# EAGLE board TSC_Board (EAGLE 9.7.0)
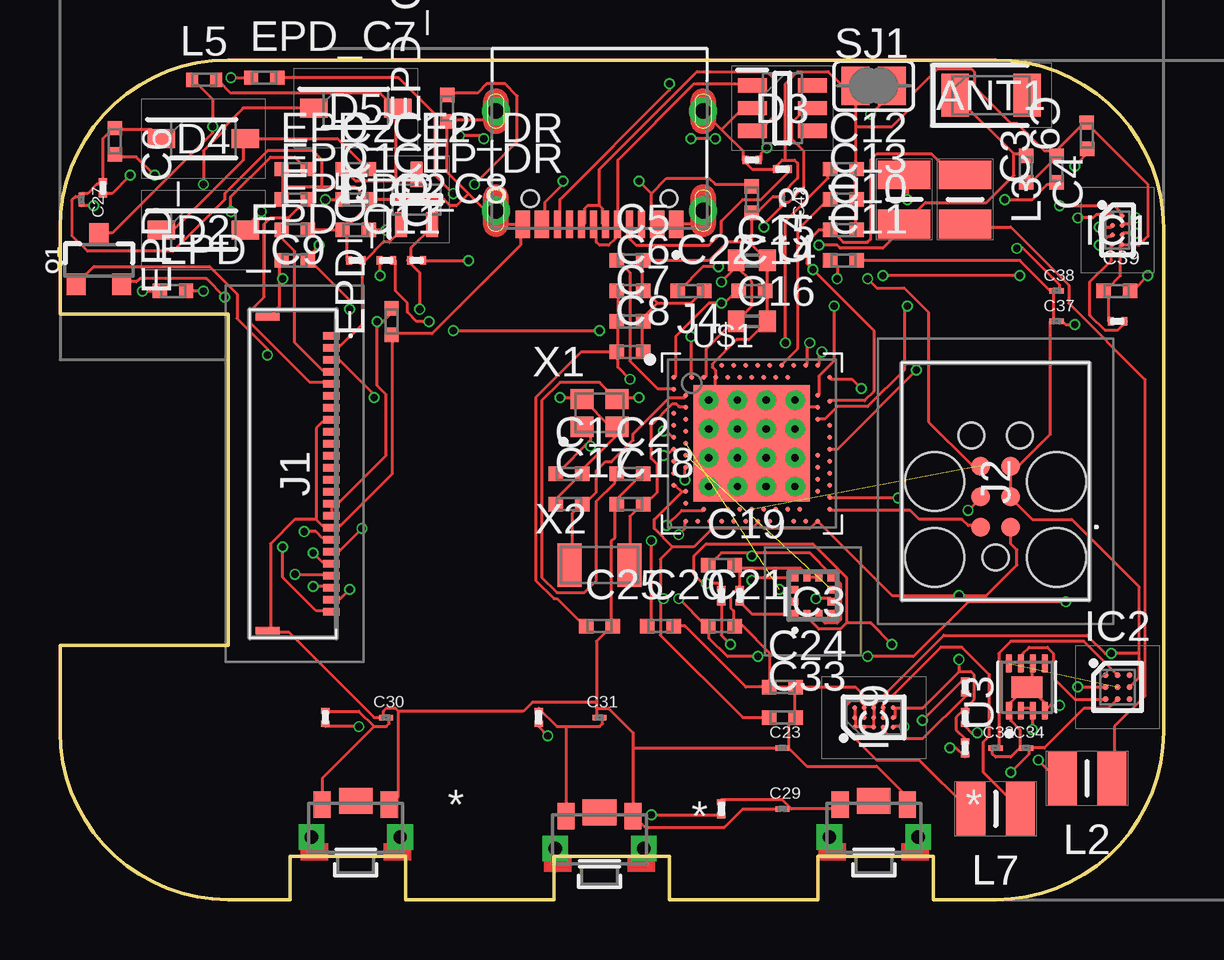
[diagram p0: board, top side]
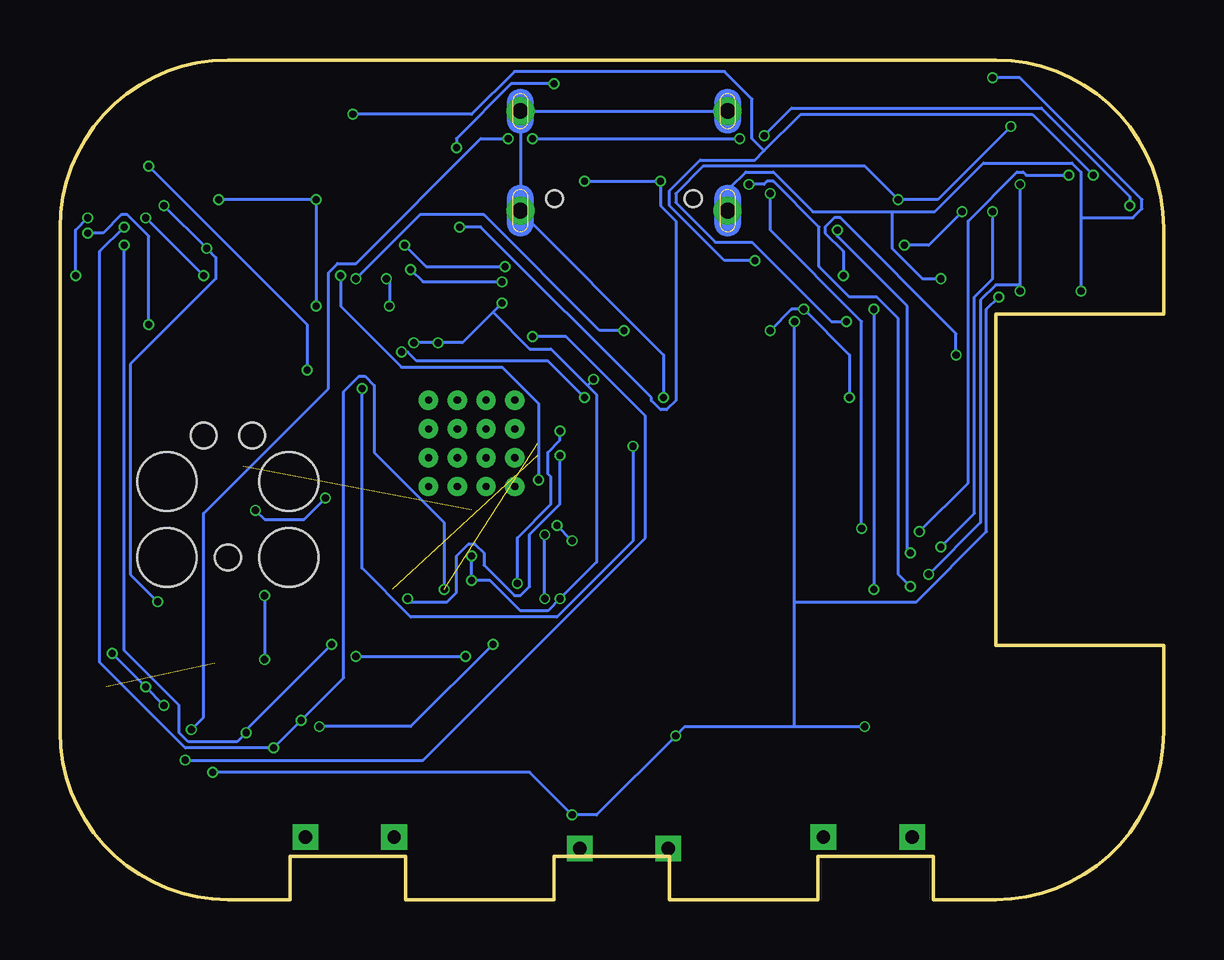
[diagram p1: board, bottom side, seen from below]

Size 46 x 35 mm. Coordinates in mm from the lower left corner, seen from the top.
Outline: 39,0 36.4,0 36.4,1.8 31.6,1.8 31.6,0 25.4,0 25.4,1.8 20.6,1.8 20.6,0 14.4,0 14.4,1.8 9.6,1.8 9.6,0 7,0 arc-90 0,7 0,10.6 7,10.6 7,24.4 0,24.4 0,28 arc-90 7,35 39,35 arc-90 46,28 46,7 arc-90 39,0
Copper layers (1*2+15*16): Top 0.035mm / dielectric 0.1mm / Route2 0.035mm / dielectric 0.7mm / Route15 0.035mm / dielectric 0.2mm / Bottom 0.035mm
Design rules "jlcpcb-2layers": minimum track width 5mil, minimum drill 0.3mm, track to track 5mil, track to pad 5mil, pad to pad 5mil, via to via 5mil, smd to smd 5mil, copper to edge 0.2mm, drill to drill 6mil, minimum pad ring 10mil, minimum via ring 3mil, stop-mask expansion 4mil, vias tented up to drill 0mil, thermal gap 10mil

## Footprints (pad centres in the part's own frame; a part is rotated, then mirrored left to right if it is on the bottom)
2450AT18B100E_ANTC3216X140N = smd 1.15 x 1.8: 1 -1.5,0; 2 1.5,0
NORDIC_NRF_3_RESC0402_N = smd 0.6 x 0.6: 1 -0.55,0; 2 0.55,0
ESP32_C6_LIBRARY_1_ESP32_WROVER_EAGLE-LTSPICE_C0402 = smd 0.7 x 0.9: 1 -0.65,0; 2 0.65,0
GRM011R60J152KE01L_2_CAPC0201X13N = smd 0.22 x 0.23: 1 -0.185,0; 2 0.185,0
ESP32_C6_LIBRARY_5_SOD3716X135N = smd 1.15 x 0.8: 1 -1.75,0; 2 1.75,0
ESP32_C6_LIBRARY_3_SOT95P280X145-6N = smd 1.2 x 0.6: 1 -1.25,0.95; 2 -1.25,0; 3 -1.25,-0.95; 4 1.25,-0.95; 5 1.25,0; 6 1.25,0.95
BQ25180YBGR_BGA8C40P2X4_100X155X50 = smd 0.2 x 0.2: A1 -0.2,0.6; A2 0.2,0.6; B1 -0.2,0.2; B2 0.2,0.2; C1 -0.2,-0.2; C2 0.2,-0.2; D1 -0.2,-0.6; D2 0.2,-0.6
DRV2605YZFR_BGA9C50P3X3_144X144X62 = smd 0.25 x 0.25: A1 -0.5,0.5; A2 0,0.5; A3 0.5,0.5; B1 -0.5,0; B2 0,0; B3 0.5,0; C1 -0.5,-0.5; C2 0,-0.5; C3 0.5,-0.5
BMA423_BMA423 = smd 0.3 x 0.35: 1 -0.75,-0.775; 2 -0.25,-0.775; 3 0.25,-0.775; 4 0.75,-0.775; 7 0.75,0.775; 8 0.25,0.775; 9 -0.25,0.775; 10 -0.75,0.775 | smd 0.35 x 0.3: 5 0.775,-0.25; 6 0.775,0.25; 11 -0.775,0.25; 12 -0.775,-0.25
RT6160AWSC_BGA15C40P3X5_140X230X60 = smd 0.216 x 0.216: A1 -0.4,0.8; A2 0,0.8; A3 0.4,0.8; B1 -0.4,0.4; B2 0,0.4; B3 0.4,0.4; C1 -0.4,0; C2 0,0; C3 0.4,0; D1 -0.4,-0.4; D2 0,-0.4; D3 0.4,-0.4; E1 -0.4,-0.8; E2 0,-0.8; E3 0.4,-0.8
503480-2400_5034802400 = smd 0.3 x 0.7: 1 -5.75,1.525; 2 -5.25,1.525; 3 -4.75,1.525; 4 -4.25,1.525; 5 -3.75,1.525; 6 -3.25,1.525; 7 -2.75,1.525; 8 -2.25,1.525; 9 -1.75,1.525; 10 -1.25,1.525; 11 -0.75,1.525; 12 -0.25,1.525; 13 0.25,1.525; 14 0.75,1.525; 15 1.25,1.525; 16 1.75,1.525; 17 2.25,1.525; 18 2.75,1.525; 19 3.25,1.525; 20 3.75,1.525; 21 4.25,1.525; 22 4.75,1.525; 23 5.25,1.525; 24 5.75,1.525 | smd 0.3 x 1: MP1 -6.54,-1.125; MP2 6.54,-1.125
TC2030-IDC_TC2030IDC = smd 0.783 x 0.783: 1 -0.953,-0.635; 2 -0.953,0.635; 3 0.317,-0.635; 4 0.317,0.635; 5 1.588,-0.635; 6 1.588,0.635 | hole 2.451: -2.223,-2.54; -2.223,2.54; 0.952,-2.54; 0.952,2.54 | hole 1.067: -2.223,0; 2.857,-1.016; 2.857,1.016
KH-TYPE-C-16P_KINGHELM_KH-TYPE-C-16P = smd 0.6 x 1.15: A1_B12 -3.2,4.725; A4_B9 -2.4,4.725; A9_B4 2.4,4.725; A12_B1 3.2,4.725 | smd 0.3 x 1.15: A5 -1.25,4.725; A6 -0.25,4.725; A7 0.25,4.725; A8 1.25,4.725; B5 1.75,4.725; B6 0.75,4.725; B7 -0.75,4.725; B8 -1.75,4.725 | drill 0.65 pad 1.05: SH1 -4.32,0; SH2 4.32,0; SH3 -4.32,4.15; SH4 4.32,4.15 | hole 0.7: -2.89,3.65; 2.89,3.65
MLP2016SR47MT0S1_INDC2016X100N = smd 1.2 x 2.2: 1 -1.028,0; 2 1.028,0
NORDIC_NRF_2_RESC0402_L = smd 0.5 x 0.6: 1 -0.5,0; 2 0.5,0
ESP32_C6_LIBRARY_4_ESP32_C6_LIBRARY_4_ESP32_C6_LIBRARY_4_ESP32_C6_LIBRARY_4_ESP32_WROVER_SPARKFUN-DISCRETESEMI_SOT23-3 = smd 0.8 x 0.9: 1 -0.95,-1; 2 0.95,-1; 3 0,1.1
ESP32_C6_LIBRARY_6_SOT65P210X110-3N = smd 1.05 x 0.5: 1 -1.05,0.65; 2 -1.05,-0.65; 3 1.05,0
CPF0201D7K68C1_0201 = smd 0.35 x 0.25: 1 0,0.275; 2 0,-0.275
ESP32_C6_LIBRARY_7_JUMPER_SJ = smd 1.168 x 1.6: 1 -0.762,0; 2 0.762,0
2025-10-22_07-23-44_LIBRARY_SW_EVP-AKE31A_PAN = smd 0.711 x 1.092: 1 -1.4,-0.972; 2 1.4,-0.972 | drill 0.559 pad 0.914 square: 3 -1.848,0.381; 4 1.848,0.381 | smd 1.397 x 1.092: 5 0,-1.124
ESP32_C6_LIBRARY_SON50P200X200X80-9N = smd 0.76 x 0.27: 1 -0.985,0.75; 2 -0.985,0.25; 3 -0.985,-0.25; 4 -0.985,-0.75; 5 0.985,-0.75; 6 0.985,-0.25; 7 0.985,0.25; 8 0.985,0.75 | smd 0.9 x 1.3: 9 0,0
NORDIC_NRF_4_AQFN50P700X700X85_HS-74N = smd 4.85 x 4.85: P$74 0,0 | drill 0.3 pad 0.6: P$75 -1.8,1.8; P$76 -0.6,1.8; P$77 0.6,1.8; P$78 1.8,1.8; P$79 -1.8,0.6; P$80 -0.6,0.6; P$81 0.6,0.6; P$82 1.8,0.6; P$83 -1.8,-0.6; P$84 -0.6,-0.6; P$85 0.6,-0.6; P$86 1.8,-0.6; P$87 -1.8,-1.8; P$88 -0.6,-1.8; P$89 0.6,-1.8; P$90 1.8,-1.8 | smd 0.2 x 0.2: P$A8 -1.25,3.25; P$A10 -0.75,3.25; P$A12 -0.25,3.25; P$A14 0.25,3.25; P$A16 0.75,3.25; P$A18 1.25,3.25; P$A20 1.75,3.25; P$A22 2.25,3.25; P$A23 2.75,3.25; P$AA24 3.25,-2.25; P$AB2 -2.75,-2.5; P$AC5 -2,-2.75; P$AC9 -1,-2.75; P$AC11 -0.5,-2.75; P$AC13 0,-2.75; P$AC15 0.5,-2.75; P$AC17 1,-2.75; P$AC19 1.5,-2.75; P$AC21 2,-2.75; P$AC24 3.25,-2.75; P$AD2 -2.75,-3.25; P$AD4 -2.25,-3.25; P$AD6 -1.75,-3.25; P$AD8 -1.25,-3.25; P$AD10 -0.75,-3.25; P$AD12 -0.25,-3.25; P$AD14 0.25,-3.25; P$AD16 0.75,-3.25; P$AD18 1.25,-3.25; P$AD20 1.75,-3.25; P$AD22 2.25,-3.25; P$AD23 2.75,-3.25; P$B1 -3.25,2.75; P$B3 -2.5,2.75; P$B5 -2,2.75; P$B7 -1.5,2.75; P$B9 -1,2.75; P$B11 -0.5,2.75; P$B13 0,2.75; P$B15 0.5,2.75; P$B17 1,2.75; P$B19 1.5,2.75; P$B24 3.25,2.75; P$C1 -3.25,2.25; P$D2 -2.75,2; P$D23 2.75,2; P$E24 3.25,1.75; P$F2 -2.75,1.5; P$F23 2.75,1.5; P$G1 -3.25,1.25; P$H2 -2.75,1; P$H23 2.75,1; P$J1 -3.25,0.75; P$J24 3.25,0.75; P$K2 -2.75,0.5; P$L1 -3.25,0.25; P$L24 3.25,0.25; P$M2 -2.75,0; P$N1 -3.25,-0.25; P$N24 3.25,-0.25; P$P2 -2.75,-0.5; P$P23 2.75,-0.5; P$R1 -3.25,-0.75; P$R24 3.25,-0.75; P$T2 -2.75,-1; P$T23 2.75,-1; P$U1 -3.25,-1.25; P$U24 3.25,-1.25; P$V23 2.75,-1.5; P$W1 -3.25,-1.75; P$W24 3.25,-1.75; P$Y2 -2.75,-2; P$Y23 2.75,-2
NORDIC_NRF_BT-XTAL_2016_N = smd 0.95 x 0.85: 1 -0.725,-0.575; 2 0.725,-0.575; 3 0.725,0.575; 4 -0.725,0.575
NORDIC_NRF_1_XTAL_3215_N = smd 1 x 1.8: 1 -1.25,0; 2 1.25,0

## Placement (x,y rotation side)
ANT1  2450AT18B100E  [2450AT18B100E_ANTC3216X140N]  38.8,33.53 0 top
C1  12pF  [NORDIC_NRF_3_RESC0402_N]  21.22,17.75 0 top
C1_EP_DR  10uF  [NORDIC_NRF_3_RESC0402_N]  12.33,29.18 0 top
C2  12pF  [NORDIC_NRF_3_RESC0402_N]  23.76,17.75 0 top
C2_EP_DR  4.7uF/25V  [NORDIC_NRF_3_RESC0402_N]  12.33,30.45 0 top
C3  1pF  [NORDIC_NRF_3_RESC0402_N]  41.54,30.45 90 top
C4  1pF  [NORDIC_NRF_3_RESC0402_N]  40.27,30.45 270 top
C5  100nF  [NORDIC_NRF_3_RESC0402_N]  23.76,26.64 0 top
C6  4.7uF  [NORDIC_NRF_3_RESC0402_N]  23.76,25.37 0 top
C7  100nF  [NORDIC_NRF_3_RESC0402_N]  23.76,24.1 0 top
C8  100nF  [NORDIC_NRF_3_RESC0402_N]  23.76,22.83 0 top
C9  820pF  [NORDIC_NRF_3_RESC0402_N]  42.8,31.84 90.8 top
C10  N.C.  [NORDIC_NRF_3_RESC0402_N]  32.65,27.91 0 top
C11  100pF  [NORDIC_NRF_3_RESC0402_N]  32.65,26.64 0 top
C12  100nF  [NORDIC_NRF_3_RESC0402_N]  32.65,30.45 0 top
C13  N.C.  [NORDIC_NRF_3_RESC0402_N]  32.65,29.18 0 top
C14  4.7uF  [NORDIC_NRF_3_RESC0402_N]  28.84,25.37 0 top
C15  1.0uF  [ESP32_C6_LIBRARY_1_ESP32_WROVER_EAGLE-LTSPICE_C0402]  28.84,26.64 0 top
C16  47nF  [ESP32_C6_LIBRARY_1_ESP32_WROVER_EAGLE-LTSPICE_C0402]  28.84,24.1 0 top
C17  12pF  [NORDIC_NRF_3_RESC0402_N]  21.22,16.48 0 top
C18  12pF  [NORDIC_NRF_3_RESC0402_N]  23.76,16.48 0 top
C19  100nF  [NORDIC_NRF_3_RESC0402_N]  27.57,13.94 0 top
C20  4.7uF  [NORDIC_NRF_3_RESC0402_N]  25.03,11.4 0 top
C21  4.7uF  [NORDIC_NRF_3_RESC0402_N]  27.57,11.4 0 top
C22  N.C.  [NORDIC_NRF_3_RESC0402_N]  26.3,25.37 0 top
C23  0.1uF  [GRM011R60J152KE01L_2_CAPC0201X13N]  30.11,6.32 0 top
C24  10uF  [NORDIC_NRF_3_RESC0402_N]  30.11,8.86 0 top
C25  22uF  [NORDIC_NRF_3_RESC0402_N]  22.49,11.4 0 top
C27  0.1uF  [GRM011R60J152KE01L_2_CAPC0201X13N]  0.9,29.18 270 top
C29  1uF  [GRM011R60J152KE01L_2_CAPC0201X13N]  30.11,3.78 0 top
C30  1uF  [GRM011R60J152KE01L_2_CAPC0201X13N]  13.6,7.59 0 top
C31  1uF  [GRM011R60J152KE01L_2_CAPC0201X13N]  22.49,7.59 0 top
C32  1uF  [GRM011R60J152KE01L_2_CAPC0201X13N]  39,6.32 0 top
C33  22uF  [NORDIC_NRF_3_RESC0402_N]  30.11,7.59 0 top
C34  0.1uF  [GRM011R60J152KE01L_2_CAPC0201X13N]  40.27,6.32 0 top
C37  1uF  [GRM011R60J152KE01L_2_CAPC0201X13N]  41.54,24.1 0 top
C38  1uF  [GRM011R60J152KE01L_2_CAPC0201X13N]  41.54,25.37 0 top
C39  10uF  [NORDIC_NRF_3_RESC0402_N]  44.05,25.37 0 top
C42  0.1uF  [GRM011R60J152KE01L_2_CAPC0201X13N]  30.11,29.18 270 top
C43  4.7uF  [NORDIC_NRF_3_RESC0402_N]  28.84,29.18 270 top
D2  MBR0530  [ESP32_C6_LIBRARY_5_SOD3716X135N]  5.98,27.91 0 top
D3  USBLC6-2SC6Y  [ESP32_C6_LIBRARY_3_SOT95P280X145-6N]  30.11,32.99 0 top
D4  MBR0530  [ESP32_C6_LIBRARY_5_SOD3716X135N]  5.98,31.72 0 top
D5  MBR0530  [ESP32_C6_LIBRARY_5_SOD3716X135N]  12.33,32.99 0 top
EPD_C1  1uF/50V  [NORDIC_NRF_3_RESC0402_N]  9.79,29.18 0 top
EPD_C2  1uF/50V  [NORDIC_NRF_3_RESC0402_N]  9.79,27.91 0 top
EPD_C5  0.1uF/50V  [NORDIC_NRF_3_RESC0402_N]  13.82,24.1 90 top
EPD_C6  1uF/50V  [NORDIC_NRF_3_RESC0402_N]  2.28,31.61 270 top
EPD_C7  1uF/50V  [NORDIC_NRF_3_RESC0402_N]  8.52,34.26 0 top
EPD_C8  1uF/50V  [NORDIC_NRF_3_RESC0402_N]  12.33,27.91 0 top
EPD_C9  1uF/50V  [NORDIC_NRF_3_RESC0402_N]  4.71,25.37 0 top
EPD_C10  1uF/50V  [NORDIC_NRF_3_RESC0402_N]  16.14,32.99 90 top
EPD_C11  1uF/50V  [NORDIC_NRF_3_RESC0402_N]  9.79,26.64 0 top
EPD_C12  1uF/50V  [NORDIC_NRF_3_RESC0402_N]  9.79,30.45 0 top
IC1  BQ25180YBGR  [BQ25180YBGR_BGA8C40P2X4_100X155X50]  44.08,27.91 0 top
IC2  DRV2605YZFR  [DRV2605YZFR_BGA9C50P3X3_144X144X62]  44.08,8.86 0 top
IC3  BMA423  [BMA423_BMA423]  31.38,12.67 0 top
IC9  RT6160AWSC  [RT6160AWSC_BGA15C40P3X5_140X230X60]  33.92,7.59 90 top
J1  503480-2400  [503480-2400_5034802400]  9.79,17.75 270 top
J2  TC2030-IDC  [TC2030-IDC_TC2030IDC]  39,16.48 90 top
J4  KH-TYPE-C-16P  [KH-TYPE-C-16P_KINGHELM_KH-TYPE-C-16P]  22.49,32.87 180 top
L1  3.9nH  [MLP2016SR47MT0S1_INDC2016X100N]  35.19,29.18 270 top
L2  10uH  [MLP2016SR47MT0S1_INDC2016X100N]  42.81,5.05 0 top
L3  15nH  [MLP2016SR47MT0S1_INDC2016X100N]  37.73,29.18 90 top
L5  68uH  [NORDIC_NRF_2_RESC0402_L]  6,34.17 0 top
L7  FTC252012SR47MBCA  [MLP2016SR47MT0S1_INDC2016X100N]  39,3.78 0 top
Q1  20V/4.2A/52mΩ/1.4W  [ESP32_C6_LIBRARY_4_ESP32_C6_LIBRARY_4_ESP32_C6_LIBRARY_4_ESP32_C6_LIBRARY_4_ESP32_WROVER_SPARKFUN-DISCRETESEMI_SOT23-3]  1.63,26.64 0 top
Q3  SI1308EDL-T1-GE3  [ESP32_C6_LIBRARY_6_SOT65P210X110-3N]  14.87,29.18 90 top
R1_EP_DR  0.47  [CPF0201D7K68C1_0201]  14.87,26.64 270 top
R1_USB  5K1  [CPF0201D7K68C1_0201]  30.11,30.45 90 top
R1_USB1  5K1  [CPF0201D7K68C1_0201]  28.84,30.83 270 top
R2  0  [CPF0201D7K68C1_0201]  27.57,12.67 0 top
R2_EP_DR  10K  [CPF0201D7K68C1_0201]  12.33,26.64 90 top
R3  0  [CPF0201D7K68C1_0201]  28.34,12.67 0 top
R4  0  [CPF0201D7K68C1_0201]  37.73,8.86 0 top
R5  10K  [CPF0201D7K68C1_0201]  11.06,7.59 0 top
R7  10K  [CPF0201D7K68C1_0201]  27.57,3.78 0 top
R8  10K  [CPF0201D7K68C1_0201]  19.95,7.59 0 top
R9  10K  [CPF0201D7K68C1_0201]  44.08,24.1 90 top
R17  3K3  [CPF0201D7K68C1_0201]  37.73,6.32 0 top
R18  3K3  [CPF0201D7K68C1_0201]  37.73,7.59 0 top
R_PWR_EPD  10K  [CPF0201D7K68C1_0201]  13.6,26.64 90 top
R_TYPE_SEL  2.2  [CPF0201D7K68C1_0201]  1.79,29.66 0 top
SJ1  [ESP32_C6_LIBRARY_7_JUMPER_SJ]  33.92,33.92 0 top
SW_DN  2025-10-22_07-23-44_LIBRARY_EVP-AKE31ASW_EVP-AKE31A_PAN  [2025-10-22_07-23-44_LIBRARY_SW_EVP-AKE31A_PAN]  33.92,2.99 180 top
SW_ENT  2025-10-22_07-23-44_LIBRARY_EVP-AKE31ASW_EVP-AKE31A_PAN  [2025-10-22_07-23-44_LIBRARY_SW_EVP-AKE31A_PAN]  22.49,2.51 180 top
SW_UP  2025-10-22_07-23-44_LIBRARY_EVP-AKE31ASW_EVP-AKE31A_PAN  [2025-10-22_07-23-44_LIBRARY_SW_EVP-AKE31A_PAN]  12.33,2.99 180 top
U3  MAX17048G+T10  [ESP32_C6_LIBRARY_SON50P200X200X80-9N]  40.31,8.86 90 top
U$1  NRF52840_QF  [NORDIC_NRF_4_AQFN50P700X700X85_HS-74N]  28.84,19.02 0 top
X1  32MHz  [NORDIC_NRF_BT-XTAL_2016_N]  22.49,20.29 0 top
X2  32.768kHz  [NORDIC_NRF_1_XTAL_3215_N]  22.49,13.94 0 top

## Library data of the parts
ANT1 = InkTime_v5; ARROW_PART_NUMBER: 2450AT18B100E; ARROW_PRICE-STOCK: https://www.arrow.com/en/products/2450at18b100e/johanson-dielectrics?utm_currency=USD&region=nac; DESCRIPTION: Antennas 2.45GHz ANTENNA; HEIGHT: 1.4mm; MANUFACTURER_NAME: JOHANSON TECHNOLOGY; MANUFACTURER_PART_NUMBER: 2450AT18B100E; MOUSER_PART_NUMBER: 609-2450AT18B100E; MOUSER_PRICE-STOCK: https://www.mouser.co.uk/ProductDetail/Johanson-Technology/2450AT18B100E?qs=yCnrNFeXz%252Bh5MFsFIXGZGA%3D%3D
C1 C1_EP_DR C2 C2_EP_DR C3-C14 C17-C22 C24 C25 C33 C39 C43 EPD_C1 EPD_C2 EPD_C5-EPD_C12 L5 R1_EP_DR R1_USB R1_USB1 R2 R2_EP_DR R3-R5 R7-R9 R17 R18 R_PWR_EPD R_TYPE_SEL SJ1 U$1 X1 X2 = InkTime_v5
C15 C16 = InkTime_v5; SPICEMODEL: NONE; SPICEPREFIX: C
C23 C27 C29-C32 C34 C37 C38 C42 = InkTime_v5; AVAILABILITY: In Stock; CHECK_PRICES: https://www.snapeda.com/parts/GRM011R60J152KE01L/Murata/view-part/?ref=eda; DESCRIPTION: SMD Capacitor X5R(EIA) with Capacitance: 1500pF Tol. 10%. Rated Voltage: 6.3Vdc; MF: Murata; MP: GRM011R60J152KE01L; PACKAGE: 0201 Murata; PRICE: None; SNAPEDA_LINK: https://www.snapeda.com/parts/GRM011R60J152KE01L/Murata/view-part/?ref=snap
D2 D4 D5 = InkTime_v5; AVAILABILITY: In Stock; CHECK_PRICES: https://www.snapeda.com/parts/MBR0530/Onsemi/view-part/?ref=eda; DESCRIPTION: Diode Schottky 30 V 500mA Surface Mount SOD-123; MF: ON Semiconductor; MP: MBR0530; PACKAGE: SOD-123-2 ON Semiconductor; PRICE: None; PURCHASE-URL: https://www.snapeda.com/api/url_track_click_mouser/?unipart_id=179458&manufacturer=ON Semiconductor&part_name=MBR0530&search_term=None; SNAPEDA_LINK: https://www.snapeda.com/parts/MBR0530/Onsemi/view-part/?ref=snap
D3 = InkTime_v5; AVAILABILITY: In Stock; CHECK_PRICES: https://www.snapeda.com/parts/USBLC6-2SC6Y/STMicroelectronics/view-part/?ref=eda; DESCRIPTION: 17V Clamp 5A (8/20µs) Ipp Tvs Diode Surface Mount SOT-23-6; MF: STMicroelectronics; MP: USBLC6-2SC6Y; PACKAGE: SOT-23-6 STMicroelectronics; PRICE: None; SNAPEDA_LINK: https://www.snapeda.com/parts/USBLC6-2SC6Y/STMicroelectronics/view-part/?ref=snap
IC1 = InkTime_v5; ARROW_PART_NUMBER: BQ25180YBGR; ARROW_PRICE-STOCK: https://www.arrow.com/en/products/bq25180ybgr/texas-instruments?utm_currency=USD&region=nac; DESCRIPTION: Charger IC Lithium Ion/Polymer, Lithium Iron Phosphate 8-DSBGA (1.6x1.1); HEIGHT: 0.5mm; MANUFACTURER_NAME: Texas Instruments; MANUFACTURER_PART_NUMBER: BQ25180YBGR; MOUSER_PART_NUMBER: 595-BQ25180YBGR; MOUSER_PRICE-STOCK: https://www.mouser.co.uk/ProductDetail/Texas-Instruments/BQ25180YBGR?qs=doiCPypUmgEWjAK%252BJAX6Tw%3D%3D
IC2 = InkTime_v5; ARROW_PART_NUMBER: DRV2605YZFR; ARROW_PRICE-STOCK: https://www.arrow.com/en/products/drv2605yzfr/texas-instruments?region=nac; DESCRIPTION: Haptic Driver for ERM/LRA with Built-In Library and Smart Loop Architecture; HEIGHT: 0.625mm; MANUFACTURER_NAME: Texas Instruments; MANUFACTURER_PART_NUMBER: DRV2605YZFR
IC3 = InkTime_v5; ARROW_PART_NUMBER: BMA423; ARROW_PRICE-STOCK: https://www.arrow.com/en/products/bma423/bosch; DESCRIPTION: Accelerometers Triaxial low-g 12bit Acceleration Sensor; HEIGHT: 1mm; MANUFACTURER_NAME: BOSCH; MANUFACTURER_PART_NUMBER: BMA423; MOUSER_PART_NUMBER: 262-BMA423; MOUSER_PRICE-STOCK: https://www.mouser.co.uk/ProductDetail/Bosch-Sensortec/BMA423?qs=HXFqYaX1Q2xC%252BSgeGoX3mg%3D%3D
IC9 = InkTime_v5; DESCRIPTION: Buck-Boost Regulator Positive Output Step-Up/Step-Down I2C DC-DC Controller IC 15-WL-CSP (BSC) (1.4x2.3); HEIGHT: 0.6mm; MANUFACTURER_NAME: RICHTEK; MANUFACTURER_PART_NUMBER: RT6160AWSC; MOUSER_PART_NUMBER: 835-RT6160AWSC; MOUSER_PRICE-STOCK: https://www.mouser.co.uk/ProductDetail/Richtek/RT6160AWSC?qs=amGC7iS6iy%2FLd9PSoixZXQ%3D%3D
J1 = InkTime_v5; DESCRIPTION: FFC & FPC Connectors 0.5mm FPC RA SMT Dual Contact 24Ckt; HEIGHT: 1.87mm; MANUFACTURER_NAME: Molex; MANUFACTURER_PART_NUMBER: 503480-2400; MOUSER_PART_NUMBER: 538-503480-2400; MOUSER_PRICE-STOCK: https://www.mouser.co.uk/ProductDetail/Molex/503480-2400?qs=OAhjpuo3Vu7efIoxFh9AOw%3D%3D
J2 = InkTime_v5; DESCRIPTION: CABLE ADAPTER 6 POS; HEIGHT: 19mm; MANUFACTURER_NAME: Tag Connect; MANUFACTURER_PART_NUMBER: TC2030-IDC
J4 = InkTime_v5; AVAILABILITY: Not in stock; CHECK_PRICES: https://www.snapeda.com/parts/KH-TYPE-C-16P/Kinghelm/view-part/?ref=eda; MF: kinghelm; MP: KH-TYPE-C-16P; PACKAGE: None; PRICE: None; SNAPEDA_LINK: https://www.snapeda.com/parts/KH-TYPE-C-16P/Kinghelm/view-part/?ref=snap
L1-L3 L7 = InkTime_v5; DESCRIPTION: SMD / SMT Inductors (Coils), L=0.47?H, L x W x T :; HEIGHT: 1mm; JLCPCB: https://jlcpcb.com/partdetail/6763488-FTC252012SR47MBCA/C5832368; MANUFACTURER_NAME: TDK; MANUFACTURER_PART_NUMBER: FTC252012SR47MBCA
Q1 = InkTime_v5; PROD_ID: TRAN-14388
Q3 = InkTime_v5; AVAILABILITY: In Stock; CHECK_PRICES: https://www.snapeda.com/parts/SI1308EDL-T1-GE3/Vishay+Siliconix/view-part/?ref=eda; DESCRIPTION: Si1308EDL-T1-GE3 N-channel MOSFET Transistor, 1.5 A, 30 V, 3-Pin SC-70 | Siliconix / Vishay SI1308EDL-T1-GE3; MF: Vishay Siliconix; MP: SI1308EDL-T1-GE3; PACKAGE: SOT-323 Vishay Semiconductor; PRICE: None; PURCHASE-URL: https://www.snapeda.com/api/url_track_click_mouser/?unipart_id=274603&manufacturer=Vishay Siliconix&part_name=SI1308EDL-T1-GE3&search_term=None; SNAPEDA_LINK: https://www.snapeda.com/parts/SI1308EDL-T1-GE3/Vishay+Siliconix/view-part/?ref=snap
SW_DN SW_ENT SW_UP = InkTime_v5; COPYRIGHT: Copyright (C) 2025 Ultra Librarian. All rights reserved.; DIGI-KEY_PART_NUMBER_1: P123437TR-ND; DIGI-KEY_PART_NUMBER_2: P123437CT-ND; DIGI-KEY_PART_NUMBER_3: P123437DKR-ND; MANUFACTURER_NAME: Panasonic; MANUFACTURER_PART_NUMBER: EVP-AKE31A
U3 = InkTime_v5; AVAILABILITY: In Stock; CHECK_PRICES: https://www.snapeda.com/parts/MAX17048G+T10/Analog+Devices/view-part/?ref=eda; DESCRIPTION: 3µA 1-Cell/2-Cell Fuel Gauge with ModelGauge; MF: Analog Devices; MP: MAX17048G+T10; PACKAGE: TDFN-8 Maxim; PRICE: None; PURCHASE-URL: https://www.snapeda.com/api/url_track_click_mouser/?unipart_id=329239&manufacturer=Analog Devices&part_name=MAX17048G+T10&search_term=None; SNAPEDA_LINK: https://www.snapeda.com/parts/MAX17048G+T10/Analog+Devices/view-part/?ref=snap

## Nets
3V3/1.7D: C34.2 IC2.C2 Q1.2 R5.2 R7.2 R8.2 R_PWR_EPD.2
3V3/2.4A: C6.1 C7.1 C8.1 C12.1 C14.1 C19.1 C25.1 C33.1 IC3.3 IC3.7 IC3.10 IC9.E2 IC9.E3 J2.1 R17.1 R18.1 U$1.P$A22 U$1.P$AD14 U$1.P$AD23 U$1.P$B1 U$1.P$W1 U$1.P$Y2
ALERT/1.6C: U3.5
ALERT/2.5C: U$1.P$J24
D+/1.5D: D3.4
D+/2.7D: U$1.P$AD6
D-/1.5D: D3.6
D-/2.7D: U$1.P$AD4
DEC3: C11.1 U$1.P$D23
DEC4_6: C10.1 C15.1 C16.1 L3.2 U$1.P$B5 U$1.P$E24
DN: D3.1 J4.A7 J4.B7
DP: D3.3 J4.A6 J4.B6
EPD_3V3: C1_EP_DR.1 EPD_C5.2 J1.15 J1.16 L5.1 Q1.3
EPD_BUSY/1.5D: J1.9
EPD_BUSY/2.2D: U$1.P$AD12
EPD_CS/1.4C: J1.12
EPD_DC/1.5D: J1.11
EPD_DC/2.2D: U$1.P$AD10
EPD_RST/1.5D: J1.10
EPD_RST/2.2D: U$1.P$AC11
EPS_CS/2.2D: U$1.P$K2
GDR: J1.2 Q3.1 R2_EP_DR.2
GND: C1.2 C1_EP_DR.2 C2.2 C3.2 C4.2 C5.2 C6.2 C7.2 C8.2 C9.2 C10.2 C11.2 C12.2 C13.2 C14.2 C15.2 C16.2 C17.1 C18.1 C19.2 C20.2 C21.2 C22.2 C23.1 C23.2 C24.1 C24.2 C25.2 C27.1 C29.1 C30.1 C31.1 C32.1 C33.2 C34.1 C37.1 C38.1 C39.1 C42.1 C43.2 D3.2 D4.1 EPD_C1.1 EPD_C2.2 EPD_C5.1 EPD_C6.1 EPD_C7.1 EPD_C8.1 EPD_C9.1 EPD_C10.1 EPD_C11.1 EPD_C12.1 IC1.D2 IC2.B1 IC2.B3 IC3.8 IC3.9 IC9.A1 IC9.A2 IC9.A3 IC9.B1 IC9.C1 IC9.C2 IC9.C3 J1.8 J1.17 J1.MP1 J1.MP2 J2.3 J2.5 J4.A1_B12 J4.A12_B1 J4.SH1 J4.SH2 J4.SH3 J4.SH4 R1_USB1.2 R1_USB.1 R2_EP_DR.1 R3.1 R9.1 R_TYPE_SEL.1 SJ1.1 SW_DN.1 SW_ENT.1 SW_UP.1 U3.1 U3.4 U3.6 U3.9 U$1.P$74 U$1.P$75 U$1.P$76 U$1.P$77 U$1.P$78 U$1.P$79 U$1.P$80 U$1.P$81 U$1.P$82 U$1.P$83 U$1.P$84 U$1.P$85 U$1.P$86 U$1.P$87 U$1.P$88 U$1.P$89 U$1.P$90 U$1.P$B7 U$1.P$F23 X1.2 X1.4
HAPTIC_EN/1.4C: IC2.A1
HAPTIC_EN/2.6A: U$1.P$U1
IMU_INT1: IC3.5 U$1.P$N1
IMU_INT2: IC3.6 U$1.P$P2
LX1: IC9.B2 IC9.B3 L7.1
LX2: IC9.D2 IC9.D3 L7.2
MOSI/1.5B: J1.14
MOSI/2.2D: U$1.P$B13
N$1: L2.1 U$1.P$B3
N$2: L2.2 L3.1
N$3: C13.1 U$1.P$A18
N$4: C1.1 U$1.P$B24 X1.1
N$5: C2.1 U$1.P$A23 X1.3
N$6: ANT1.1 C4.1 C22.1 L1.2
N$7: C3.1 L1.1 U$1.P$H23
N$8: C9.1 U$1.P$N24
N$9: C5.1 U$1.P$C1
N$10: C17.2 U$1.P$D2 X2.1
N$11: C18.2 U$1.P$F2 X2.2
N$12: C20.1 U$1.P$AC5
N$13: IC3.1 R3.2
N$14: IC9.D1 R4.2
N$15: IC9.E1 R2.2
N$16: IC1.D1 R9.2
N$17: C2_EP_DR.1 D5.2 L5.2 Q3.3
N$18: R1_EP_DR.1 R_TYPE_SEL.2 SJ1.2
N$19: C2_EP_DR.2 D2.1 D4.2
N$20: C32.2 IC2.A2
N$21: EPD_C2.1 J1.4
N$22: EPD_C1.2 J1.5
N$23: EPD_C7.2 J1.19
N$24: EPD_C6.2 J1.18
N$25: EPD_C8.2 J1.20
N$26: C29.2 R7.1 SW_DN.2
N$27: EPD_C10.2 J1.22
N$28: J4.A5 R1_USB.2
N$29: EPD_C12.2 J1.24
N$30: J4.B5 R1_USB1.1
OUT+: IC2.A3
OUT-: IC2.C3
P0.1: U$1.P$A10
P0.2: U$1.P$B11
P0.04: U$1.P$J1
P0.09: U$1.P$L24
P0.13/1.5D: C30.2 R5.1 SW_UP.2
P0.13/2.6C: U$1.P$AD8
P0.14/1.5D: C31.2 R8.1 SW_ENT.2
P0.19: U$1.P$AC15
P0.20: U$1.P$AD16
P0.21: U$1.P$AC17
P0.22: U$1.P$AD18
P0.23: U$1.P$AC19
P0.24: U$1.P$AD20
P0.25: U$1.P$AC21
P0.26: U$1.P$G1
P0.27: U$1.P$H2
P0.30: U$1.P$B9
P0.31: U$1.P$A8
P1.01/1.6C: Q1.1 R_PWR_EPD.1
P1.01/2.4B: U$1.P$Y23
P1.02/2.8C: U$1.P$W24
P1.03: U$1.P$V23
P1.04: U$1.P$U24
P1.05: U$1.P$T23
P1.06: U$1.P$R24
P1.07: U$1.P$P23
P1.09: U$1.P$R1
P1.10: U$1.P$A20
P1.11: U$1.P$B19
P1.12: U$1.P$B17
P1.13: U$1.P$A16
P1.14: U$1.P$B15
P1.15: U$1.P$A14
P.014/2.7C: U$1.P$AC9
PMIC_INT: IC1.A1 U$1.P$T2
PREVGH: D5.1 EPD_C9.2 J1.21
PREVGL: D2.2 EPD_C11.2 J1.23
RESET: J1.3 J2.6 Q3.2 R1_EP_DR.2 U$1.P$AC13
SCK/1.5B: J1.13
SCK/2.2D: U$1.P$A12
SCL/1.4C: IC2.C1 U3.7
SCL/2.4C: IC1.B1 IC3.12 R4.1 R17.2 U$1.P$M2
SDA/1.4C: IC2.B2 U3.8
SDA/2.4C: IC1.C1 IC3.2 R2.1 R18.2 U$1.P$L1
SWDCLK: J2.4 U$1.P$AA24
SWDIO: J2.2 U$1.P$AC24
SWO: U$1.P$AD22
VBAT/1.2A: C27.2 U3.2 U3.3
VBAT/2.5C: C37.2 IC1.C2
VBUS/1.5D: C42.2 C43.1 D3.5 J4.A4_B9 J4.A9_B4
VBUS/2.6D: C21.1 C38.2 IC1.A2 U$1.P$AD2
VREG: C39.2 IC1.B2

## Tracks (layer width: path | path; a pad name or v marks a point on that pad's centre or on a via)
3V3/1.7D  (via drill 0.3)
  Top 0.127: IC2.C2 43.7,7.97 42.68,7.97 41.03,6.32 C34.2 40.4,6.32 40.4,6.07 v39.63,5.3 | v24.65,3.53 27.57,3.53 R7.2 | v20.33,6.83 19.95,7.21 R8.2 | v12.46,7.21 11.06,7.21 R5.2 | v15.38,24.1 14.87,24.1 14.49,24.48 14.49,24.86 13.98,25.37 13.98,26.64 R_PWR_EPD.2 | v6.87,25.12 6.11,25.88 3.31,25.88 3.19,25.75 2.68,25.75 Q1.2
  Bottom 0.127: 15.38,7.21 19.95,7.21 v20.33,6.83 23.63,3.53 v24.65,3.53 26.43,5.3 v39.63,5.3 | 15.38,7.21 v12.46,7.21 | 15.38,7.21 15.38,12.42 | 15.38,12.42 v15.38,24.1 | v6.87,25.12 7.38,24.61 7.38,15.34 10.3,12.42 15.38,12.42
3V3/2.4A  (via drill 0.3)
  Top 0.127: 34.81,7.97 34.81,7.59 IC9.E2 | 34.81,7.97 35.95,7.97 37.48,9.5 | 37.48,9.5 37.98,9.5 38.11,9.37 38.11,8.35 37.73,7.97 | 34.81,7.97 IC9.E3 | 37.73,7.97 37.35,7.59 37.35,7.08 37.73,6.7 R17.1 | 37.73,7.97 R18.1 | 25.92,16.99 25.66,17.24 U$1.P$W1 | 25.92,16.99 26.05,16.99 U$1.P$Y2 | 29.09,15.72 29.35,15.46 31.25,15.46 31.51,15.72 U$1.P$AD23 31.63,15.72 34.68,12.67 v37.48,12.67 38.62,12.67 39.89,13.94 39.89,14.58 39.63,14.83 J2.1 | 25.92,16.99 24.78,15.84 24.78,15.46 25.54,14.7 | 25.54,14.7 26.43,14.7 27.19,15.46 28.84,15.46 29.09,15.72 | 29.09,15.72 U$1.P$AD14 | C33.1 28.46,7.59 25.03,11.02 25.03,12.54 | 25.03,12.54 25.03,14.19 25.54,14.7 | v37.48,10 37.48,9.5 | 23.25,24.1 23.25,25.37 C6.1 | C25.1 21.85,11.4 20.71,12.54 20.59,12.54 19.82,13.3 19.82,20.92 21.73,22.83 C8.1 23.25,22.83 | 23.25,22.83 23.25,24.1 | 23.25,24.1 C7.1 | 32.14,13.56 32.52,13.18 32.52,11.65 32.4,11.53 31.89,11.53 31.63,11.78 IC3.3 | 28.84,14.45 31.25,14.45 32.14,13.56 | 28.84,14.45 27.57,14.45 27.06,13.94 C19.1 | 32.14,13.56 IC3.7 | U$1.P$B1 25.66,21.81 25.66,23.47 27.06,24.86 v27.57,24.86 27.7,24.86 28.21,25.37 C14.1 | v31.25,23.21 31.13,23.08 31.13,22.32 U$1.P$A22 | v28.84,13.3 28.97,13.43 30.62,13.43 IC3.10 | v30.24,23.21 30.24,28.29 32.02,30.07 32.02,30.45 C12.1 | v28.84,14.32 28.84,14.45 | 23.25,22.83 23.25,22.19 v23.76,21.69 | v25.16,12.54 25.03,12.54
  Bottom 0.127: v37.48,12.67 v37.48,10 | v31.25,23.21 v30.24,23.21 29.22,23.21 27.95,24.48 | v27.57,24.86 27.95,24.48 | 24.01,21.43 25.54,22.96 26.43,22.96 27.95,24.48 | 24.01,21.43 23.63,21.05 23.63,14.07 v25.16,12.54 25.66,12.03 26.81,12.03 28.08,13.3 v28.84,13.3 v28.84,14.32 | 24.01,21.43 v23.76,21.69
DEC3  (via drill 0.3)
  Top 0.127: v32.27,24.73 32.27,22.45 31.63,21.81 31.63,21.05 U$1.P$D23 | v32.4,25.88 32.4,26.39 32.14,26.64 C11.1
  Bottom 0.127: v32.27,24.73 32.27,25.75 v32.4,25.88
DEC4_6  (via drill 0.3)
  Top 0.127: U$1.P$B5 26.94,21.81 26.94,22.96 28.08,24.1 C16.1 28.21,24.1 28.84,24.73 28.84,25.75 28.21,26.39 | 28.21,26.39 28.21,26.64 C15.1 28.21,26.39 | U$1.P$E24 32.14,20.8 33.54,20.8 33.92,21.18 33.92,23.72 v31.38,26.26 31.13,26.51 31.13,27.4 31.63,27.91 C10.1 32.14,27.91 32.65,27.4 33.67,27.4 33.79,27.53 33.79,30.83 34.05,31.08 36.33,31.08 37.09,30.32 37.73,30.32 L3.2 | v27.57,25.75 28.21,26.39
  Bottom 0.127: v27.57,25.75 30.87,25.75 v31.38,26.26
DN
  Top 0.127: J4.A7 22.36,28.04 22.36,27.4 22.49,27.28 22.87,27.28 23.12,27.53 23.12,28.04 J4.B7 23.25,28.16 23.25,30.83 26.43,34.01 28.84,34.01 D3.1
DP
  Top 0.127: 22.49,28.93 21.98,28.93 21.85,28.8 21.85,28.16 J4.B6 | 22.49,28.93 22.62,28.8 22.62,28.16 J4.A6 | 22.49,28.93 22.49,30.45 26.55,34.51 29.47,34.51 29.73,34.26 29.73,32.61 29.22,32.1 28.97,32.1 D3.3
EPD_3V3  (via drill 0.3)
  Top 0.127: 13.35,23.97 13.22,23.85 13.22,21.43 13.6,21.05 13.6,18.51 11.69,16.61 11.44,16.61 J1.15 11.31,16.48 11.31,16.1 J1.16 | 13.35,23.97 13.73,24.35 13.73,24.61 EPD_C5.2 | v11.06,29.18 C1_EP_DR.1 | L5.1 5.6,34.13 6.36,33.37 v6.36,32.23 6.36,31.97 2.17,27.78 1.66,27.78 Q1.3 | v13.22,24.1 13.35,23.97
  Bottom 0.127: v6.36,32.23 9.41,29.18 v11.06,29.18 12.46,30.58 19.19,30.58 20.33,29.43 20.33,29.05 18.68,27.4 17.16,27.4 13.85,24.1 v13.22,24.1
GDR
  Top 0.127: Q3.1 14.11,28.04 14.11,27.78 13.73,27.4 13.47,27.4 12.71,26.64 R2_EP_DR.2 12.58,26.64 12.58,23.97 11.69,23.08 11.44,23.08 J1.2
GND  (via drill 0.3)
  Top 0.127: C11.2 40.02,26.64 41.29,25.37 C38.1 41.41,25.37 41.41,24.1 C37.1 41.29,24.1 41.29,19.4 40.02,18.13 39.63,18.13 J2.5 J2.3 39.63,16.73 40.52,15.84 42.18,15.84 44.97,13.05 44.97,10.26 | v42.43,8.86 IC2.B1 | v41.67,8.1 41.29,8.1 41.16,7.97 U3.4 41.03,7.97 41.03,8.22 40.4,8.86 | 40.02,6.32 39.63,5.94 39,5.94 38.87,6.07 38.87,6.32 C32.1 | 40.02,6.32 40.02,7.08 39.63,7.46 39.63,7.84 U3.1 39.63,7.97 39.63,8.22 40.27,8.86 U3.9 40.4,8.86 | 40.02,6.32 C34.1 | 40.4,8.86 40.52,8.99 40.52,9.75 U3.6 | 44.97,10.26 44.97,9.24 IC2.B3 | 44.97,10.26 v43.83,10.26 43.57,10.26 42.81,11.02 36.84,11.02 33.92,8.1 | 14.11,7.84 13.98,7.97 13.6,7.97 13.47,7.84 13.47,7.59 C30.1 13.09,7.59 9.54,11.15 8.77,11.15 J1.MP2 8.77,11.27 8.77,14.83 9.79,15.84 10.68,15.84 | 14.11,7.84 14.11,4.29 13.85,4.03 SW_UP.1 | 10.68,15.84 10.93,15.59 11.31,15.59 J1.17 11.44,15.59 11.69,15.59 13.85,17.75 13.85,23.47 EPD_C5.1 13.85,23.59 15.5,23.59 19.19,27.28 19.19,28.04 J4.A12_B1 19.19,28.16 18.68,28.16 18.17,28.67 J4.SH4 18.05,28.8 17.66,28.8 17.03,29.43 | 10.68,15.84 10.68,19.66 10.93,19.91 11.31,19.91 J1.8 | IC3.8 31.51,13.43 31.25,13.43 IC3.9 31.13,13.56 30.87,13.81 28.33,13.81 | 28.33,13.81 28.33,13.05 | 28.33,13.81 28.21,13.94 C19.2 28.33,13.81 | 28.33,13.05 27.95,12.67 27.95,12.16 28.08,12.03 28.08,11.4 C21.2 28.46,11.4 29.6,10.26 29.6,8.86 | 28.33,13.05 R3.1 | 30.36,6.32 30.36,7.34 30.62,7.59 | 33.16,7.59 33.16,7.21 | 33.16,7.59 33.16,7.97 IC9.A3 | 33.16,7.59 IC9.A2 | 33.16,7.21 33.54,7.21 | 33.16,7.21 IC9.A1 | 33.54,7.21 33.92,7.21 | 33.54,7.21 IC9.B1 | 33.92,7.21 IC9.C2 33.92,7.97 IC9.C3 33.92,8.1
  Top 0.127: 33.92,7.21 IC9.C1 | C20.2 26.05,11.4 28.59,8.86 C24.1 29.6,8.86 | 29.6,8.86 30.62,8.86 | 33.92,8.1 33.16,8.86 C24.2 30.62,8.86 | 30.62,8.86 30.62,7.59 | 30.62,7.59 C33.2 | 30.36,6.32 31.13,5.56 34.05,5.56 35.32,4.29 35.32,4.03 SW_DN.1 | 30.36,6.32 C23.2 C23.1 23.89,6.32 | C29.1 28.46,3.78 27.7,3.02 24.4,3.02 24.01,3.4 SW_ENT.1 23.89,3.53 23.89,6.32 | C2.2 24.27,17.75 23.25,16.73 23.25,16.48 C18.1 23.12,16.48 23.12,15.08 23,14.96 23,11.4 | 22.36,8.22 22.36,10.77 23,11.4 | 22.36,8.22 22.36,7.97 | 22.36,7.97 22.36,7.59 C31.1 | 23,11.4 C25.2 | 23.89,6.32 23.89,6.95 22.87,7.97 22.36,7.97 | 14.11,7.84 19.31,7.84 19.7,8.22 22.36,8.22 | D4.1 4.2,31.72 3.82,32.1 2.3,32.1 EPD_C6.1 2.17,32.1 1.79,31.72 R_TYPE_SEL.1 1.79,29.81 1.53,29.81 1.15,29.43 0.9,29.43 C27.1 0.9,29.31 0.65,29.31 0.52,29.18 0.52,27.66 1.15,27.02 4.71,27.02 6.87,29.18 6.87,29.43 8.65,31.21 10.55,31.21 10.93,30.83 10.93,29.69 | 9.28,29.69 9.28,30.45 EPD_C12.1 | 9.28,29.69 9.28,29.18 EPD_C1.1 | 11.82,27.91 11.95,27.78 11.95,26.64 R2_EP_DR.1 | EPD_C2.2 EPD_C8.1 11.82,27.91 | 12.84,29.18 12.84,28.93 11.82,27.91 | 10.93,29.69 12.33,29.69 12.84,29.18 | 10.93,29.69 9.28,29.69 | 12.84,29.18 C1_EP_DR.2 16.01,29.18 16.27,28.93 16.52,28.93 17.03,29.43 | 9.16,25.88 9.16,24.73 8.77,24.35 J1.MP1 | 9.16,25.88 9.16,26.64 EPD_C11.1 | J4.SH2 18.05,32.86 17.66,32.48 16.14,32.48 EPD_C10.1 16.14,30.32 17.03,29.43 | v3.44,25.37 EPD_C9.1 | v7.12,34.26 EPD_C7.1 | v9.28,25.88 9.16,25.88 | 43.7,25.5 43.57,25.37 C39.1 43.7,25.5 | 43.7,25.5 44.21,26 44.21,27.28 IC1.D2 44.33,27.28 44.97,27.28 45.35,27.66 45.35,29.81 42.81,32.36 C9.2 42.68,32.36 41.54,31.21
  Top 0.127: 43.7,25.5 43.7,24.1 R9.1 | C4.2 40.27,29.94 40.52,29.94 41.54,30.96 C3.2 | C3.2 41.54,31.21 | 27.06,20.92 27.32,21.18 27.32,21.69 U$1.P$B7 27.32,21.81 27.32,22.07 27.19,22.19 27.19,22.32 28.21,23.34 28.71,23.34 29.47,24.1 | 30.75,20.8 31,20.54 31.51,20.54 U$1.P$F23 | 27.06,18.39 27.06,17.24 U$1.P$87 | 27.06,18.39 U$1.P$83 | 27.06,18.39 U$1.P$74 | 27.7,20.29 27.06,19.66 U$1.P$79 | 27.06,20.92 U$1.P$75 | 27.06,20.92 U$1.P$74 | 29.35,17.24 28.33,17.24 U$1.P$88 | U$1.P$84 28.21,18.51 28.21,18.77 U$1.P$74 | U$1.P$80 28.33,19.66 U$1.P$74 | 29.35,17.24 U$1.P$89 29.47,17.24 30.62,17.24 U$1.P$90 | 29.35,17.24 29.09,18.13 | 29.09,18.13 29.35,18.39 U$1.P$85 | 29.09,18.13 U$1.P$74 | 30.62,19.53 30.62,18.51 U$1.P$86 | 29.47,19.66 U$1.P$81 U$1.P$74 | 30.62,19.53 U$1.P$82 | 30.62,19.53 U$1.P$74 | 27.7,20.29 28.21,20.8 U$1.P$76 | 27.7,20.29 U$1.P$74 | U$1.P$77 29.47,20.8 30.11,20.16 U$1.P$74 | 30.75,20.8 U$1.P$78 | 30.75,20.8 U$1.P$74 | 33.16,29.18 33.16,27.91 C10.2 | 33.16,29.18 33.16,30.45 | 33.16,29.18 C13.2 | 33.16,32.23 SJ1.1 33.16,34.01 32.52,34.01 32.02,34.51 30.75,34.51 30.24,34.01 30.24,30.83 | 33.16,32.23 33.16,30.45 | 33.16,30.45 C12.2 | C17.1 20.71,16.48 20.71,16.73 21.73,17.75 C1.2 21.85,17.75 21.85,18 23.12,19.27 23.12,19.66 X1.2 23.12,19.78 22.87,19.78 21.85,20.8 X1.4 21.73,20.92 v20.84,20.92 | C8.2 24.27,22.83 24.27,24.1 C7.2 24.4,24.1 24.4,24.35 24.9,24.86 | 24.9,24.86 26.3,24.86 26.81,25.37 C22.2 | 24.9,24.86 24.4,25.37 C6.2 24.27,25.37 24.27,26.64 C5.2 27.06,26.64 27.82,27.4 28.84,27.4 | 29.47,26.64 29.47,25.37 | 29.47,25.37 29.47,24.1 | 29.47,25.37 C14.2 | 28.84,27.4 28.84,27.28 29.47,26.64
  Top 0.127: 28.84,27.4 C43.2 28.84,28.67 29.09,28.67 29.73,29.31 30.11,29.31 C42.1 30.11,29.43 30.75,30.07 30.75,30.7 30.62,30.83 30.24,30.83 | 29.47,26.64 C15.2 | J4.A1_B12 25.79,28.16 26.3,28.16 26.81,28.67 J4.SH3 | 29.73,30.45 28.84,30.45 28.59,30.7 R1_USB1.2 28.46,30.83 28.46,31.21 27.57,32.1 | 27.57,32.1 J4.SH1 | D3.2 28.46,32.99 27.57,32.1 | 30.24,30.83 30.11,30.83 29.73,30.45 | 29.73,30.45 R1_USB.1 | 29.47,24.1 C16.2 | 41.54,31.21 41.03,31.21 39.89,32.36 39.63,32.36 38.11,33.88 38.11,34.51 37.98,34.64 36.59,34.64 35.57,33.62 35.57,33.12 34.68,32.23 33.16,32.23 | 41.54,31.08 C3.2
  Bottom 0.127: v41.67,8.1 v42.43,8.86 v43.83,10.26 | 3.44,28.42 3.44,30.32 3.82,30.7 7.5,30.7 9.54,28.67 11.31,28.67 | 3.44,28.42 v3.44,25.37 | 11.31,28.67 14.62,28.67 16.27,30.32 17.41,30.32 18.05,29.69 18.05,28.8 J4.SH4 | v7.12,34.26 5.98,34.26 0.9,29.18 0.9,28.8 1.28,28.42 3.44,28.42 | v9.28,25.88 10.04,25.88 11.31,27.15 11.31,28.67 | J4.SH1 26.81,28.8 J4.SH3 26.81,28.67 20.84,22.7 v20.84,20.92 | J4.SH1 J4.SH2 | J4.SH1
IMU_INT1  (via drill 0.3)
  Top 0.127: v25.16,18.51 25.28,18.51 25.54,18.77 U$1.P$N1 | v31.51,12.54 32.14,12.54 IC3.5
  Bottom 0.127: v25.16,18.51 25.16,16.48 26.43,15.21 26.43,13.05 26.81,12.67 27.06,12.67 28.33,13.94 28.33,14.45 28.71,14.83 28.97,14.83 29.47,14.32 29.47,12.8 29.86,12.42 31.38,12.42 v31.51,12.54
IMU_INT2  (1 unrouted)
LX1
  Top 0.127: 33.54,7.97 33.54,7.59 IC9.B2 | 33.54,7.97 33.54,8.1 33.28,8.35 33.03,8.35 32.78,8.1 32.78,7.08 34.05,5.81 35.82,5.81 37.86,3.78 L7.1 | 33.54,7.97 IC9.B3
LX2
  Top 0.127: 34.3,7.97 34.3,7.59 IC9.D2 | 34.3,7.97 34.3,8.1 36.71,10.51 37.6,10.51 38.75,9.37 38.75,6.83 38.49,6.57 38.49,5.3 40.02,3.78 L7.2 | 34.3,7.97 IC9.D3
N$1  (via drill 0.3)
  Top 0.127: v26.3,23.47 26.3,21.81 U$1.P$B3 | v40.78,5.81 41.54,5.05 L2.1
  Bottom 0.127: v26.3,23.47 24.9,23.47 21.6,20.16 21.6,15.08 30.87,5.81 v40.78,5.81
N$2
  Top 0.127: L2.2 43.95,5.05 43.95,7.21 45.22,8.48 45.22,21.69 42.05,24.86 42.05,25.62 39.63,28.04 37.73,28.04 L3.1
N$3
  Top 0.127: U$1.P$A18 30.11,22.32 30.75,22.96 30.75,27.91 32.02,29.18 C13.1
N$4  (via drill 0.3)
  Top 0.127: v33.41,21.31 33.03,21.69 32.14,21.69 U$1.P$B24 | 22.11,19.15 22.11,19.4 21.85,19.66 X1.1 | 22.11,19.15 v22.11,18.89 | 22.11,19.15 20.71,17.75 C1.1
  Bottom 0.127: v33.41,21.31 33.41,13.81 31.38,11.78 25.28,11.78 22.11,14.96 v22.11,18.89
N$5  (via drill 0.3)
  Top 0.127: v31.76,22.83 31.63,22.7 31.63,22.32 U$1.P$A23 | v24.14,20.92 23.25,20.92 X1.3 23.12,20.92 22.49,21.56 20.84,21.56 20.08,20.8 20.08,13.43 20.71,12.8 21.85,12.8 22.36,13.3 22.36,16.61 23.12,17.37 23.12,17.75 C2.1
  Bottom 0.127: v31.76,22.83 31.51,22.83 31.13,22.45 25.66,22.45 v24.14,20.92
N$6  (via drill 0.3)
  Top 0.127: 39.76,31.08 40.27,31.08 C4.1 | 39.76,31.08 37.35,33.5 ANT1.1 | v27.44,26.39 26.81,26.39 25.79,25.37 C22.1 | v31.63,27.28 32.4,27.28 32.52,27.15 34.3,27.15 35.19,28.04 L1.2 35.19,28.16 36.08,29.05 38.62,29.05 39.76,30.2 39.76,31.08
  Bottom 0.127: v27.44,26.39 30.75,26.39 v31.63,27.28
N$7  (via drill 0.3)
  Top 0.127: v35.32,24.73 35.19,24.61 35.19,22.07 33.67,20.54 32.4,20.54 31.89,20.04 31.63,20.04 U$1.P$H23 | v35.32,29.18 35.32,30.07 35.19,30.2 L1.1 | v39.38,29.18 40.52,29.18 41.16,29.81 41.54,29.81 C3.1
  Bottom 0.127: v35.32,24.73 v35.32,29.18 v39.38,29.18
N$8  (via drill 0.3)
  Top 0.127: v35.7,22.07 32.4,18.77 32.14,18.77 U$1.P$N24 | v42.3,30.58 42.94,31.21 C9.1
  Bottom 0.127: v35.7,22.07 35.7,23.97 v42.3,30.58
N$9
  Top 0.127: U$1.P$C1 25.54,21.31 24.9,21.31 23.76,22.45 23.76,26.13 23.25,26.64 C5.1
N$10
  Top 0.127: U$1.P$D2 26.05,20.92 25.41,20.92 23.89,19.4 23.89,19.15 23,18.26 22.74,18.26 22.36,17.88 22.36,16.99 21.85,16.48 C17.2 21.73,16.48 21.35,16.1 21.35,13.94 X2.1
N$11
  Top 0.127: U$1.P$F2 26.05,20.54 25.79,20.54 25.66,20.67 25.54,20.67 24.65,19.78 24.65,18.39 24.9,18.13 24.9,16.99 24.4,16.48 C18.2 24.27,16.48 23.76,15.97 23.76,13.94 X2.2
N$12  (via drill 0.3)
  Top 0.127: v25.28,15.59 25.92,16.23 26.81,16.23 U$1.P$AC5 | v24.65,14.96 24.65,11.53 24.52,11.4 C20.1
  Bottom 0.127: v24.65,14.96 v25.28,15.59
N$13
  Top 0.127: IC3.1 30.62,11.91 28.84,11.91 28.46,12.29 R3.2
N$14
  Top 0.127: IC9.D1 34.3,7.21 34.3,7.08 34.68,6.7 35.95,6.7 37.73,8.48 R4.2
N$15  (via drill 0.3)
  Top 0.127: v35.19,7.21 34.81,7.21 IC9.E1 | v27.95,10.64 27.57,11.02 R2.2
  Bottom 0.127: v35.19,7.21 31.38,7.21 v27.95,10.64
N$16
  Top 0.127: IC1.D1 43.83,27.28 43.83,26.64 42.94,25.75 42.94,24.35 43.57,23.72 44.08,23.72 44.46,24.1 R9.2
N$17
  Top 0.127: 13.98,29.94 14.62,29.94 14.87,30.2 Q3.3 | 13.98,29.94 12.33,29.94 11.82,30.45 C2_EP_DR.1 | 13.98,32.99 13.35,33.62 7.12,33.62 6.62,34.13 L5.2 | 13.98,32.99 13.98,29.94 | 13.98,32.99 D5.2
N$18  (via drill 0.3)
  Top 0.127: v2.93,30.2 2.17,29.43 1.92,29.43 R_TYPE_SEL.2 | R1_EP_DR.1 v17.03,26.64 | SJ1.2 34.68,33.62 v33.79,32.74
  Bottom 0.127: v2.93,30.2 5.47,32.74 15.12,32.74 16.65,31.21 | 16.65,31.21 17.03,30.83 19.31,30.83 20.59,29.56 20.59,28.93 18.3,26.64 v17.03,26.64 | v33.79,32.74 28.84,32.74 27.06,34.51 18.3,34.51 17.16,33.37 17.16,31.72 16.65,31.21
N$19
  Top 0.127: C2_EP_DR.2 12.84,30.45 11.57,31.72 D4.2 7.63,31.72 7.63,30.83 4.71,27.91 D2.1
N$20
  Top 0.127: C32.2 39.13,6.32 39.13,10.26 39.63,10.77 42.68,10.77 IC2.A2
N$21
  Top 0.127: EPD_C2.1 9.28,27.91 9.28,27.53 9.79,27.02 9.79,23.21 10.93,22.07 11.31,22.07 J1.4
N$22
  Top 0.127: EPD_C1.2 10.3,29.18 9.54,28.42 8.77,28.42 8.52,28.16 8.52,25.12 7.88,24.48 7.88,24.1 10.43,21.56 11.31,21.56 J1.5
N$23  (via drill 0.3)
  Top 0.127: EPD_C7.2 14.11,34.26 15.63,32.74 15.63,30.2 v16.39,29.43 | v12.58,15.46 11.69,14.58 11.44,14.58 J1.19
  Bottom 0.127: v16.39,29.43 16.39,27.91 12.58,24.1 v12.58,15.46
N$24  (via drill 0.3)
  Top 0.127: v3.95,30.2 3.19,30.96 2.3,30.96 EPD_C6.2 | v10.17,15.34 10.68,15.34 10.93,15.08 11.31,15.08 J1.18
  Bottom 0.127: v3.95,30.2 5.73,30.2 5.85,30.32 6.11,30.32 8.14,28.29 8.14,17.37 v10.17,15.34
N$25  (via drill 0.3)
  Top 0.127: v13.6,27.91 EPD_C8.2 | v10.55,14.45 10.93,14.07 11.31,14.07 J1.20
  Bottom 0.127: v13.6,27.91 13.6,27.66 10.68,24.73 10.68,14.58 v10.55,14.45
N$26
  Top 0.127: 30.49,3.78 32.27,3.78 32.4,3.91 SW_DN.2 | 30.49,3.78 C29.2 | 30.49,3.78 30.11,4.16 27.57,4.16 R7.1
N$27  (via drill 0.3)
  Top 0.127: v17.28,29.81 19.06,31.59 19.06,33.5 18.55,34.01 17.79,34.01 17.41,33.62 16.14,33.62 EPD_C10.2 | v10.55,13.05 11.31,13.05 J1.22
  Bottom 0.127: v17.28,29.81 16.65,29.81 16.52,29.94 16.27,29.94 14.36,28.04 14.36,26.39 13.09,25.12 11.95,25.12 11.06,24.23 11.06,13.56 v10.55,13.05
N$28
  Top 0.127: R1_USB.2 30.36,30.45 30.36,30.32 29.22,29.18 28.46,29.18 27.57,28.29 27.57,27.78 27.06,27.28 24.01,27.28 23.76,27.53 23.76,28.04 J4.A5
N$29  (via drill 0.3)
  Top 0.127: v7.12,28.67 7.12,29.31 8.77,30.96 9.79,30.96 10.3,30.45 EPD_C12.2 | v9.28,14.7 9.28,13.43 10.68,12.03 11.31,12.03 J1.24
  Bottom 0.127: v7.12,28.67 7.12,25.88 7.88,25.12 7.88,16.1 v9.28,14.7
N$30  (via drill 0.3)
  Top 0.127: v29.47,31.34 29.22,31.08 29.22,30.83 R1_USB1.1 | v25.41,34.01 25.41,33.75 20.84,29.18 20.84,28.16 J4.B5
  Bottom 0.127: v29.47,31.34 29.47,31.72 27.19,34.01 v25.41,34.01
P0.13/1.5D
  Top 0.127: 13.09,7.21 13.6,7.21 13.73,7.34 13.73,7.59 C30.2 | 13.09,7.21 12.46,7.84 11.06,7.84 R5.1 | 13.09,7.21 10.93,5.05 10.93,4.03 SW_UP.2
P0.14/1.5D
  Top 0.127: 21.09,7.21 20.71,7.21 19.95,7.97 R8.1 | 21.09,7.21 22.49,7.21 22.62,7.34 22.62,7.59 C31.2 | 21.09,7.21 21.09,3.53 SW_ENT.2
P1.01/1.6C  (via drill 0.3)
  Top 0.127: v13.35,26 13.35,26.64 R_PWR_EPD.1 | v8.65,22.7 8.65,22.96 7.38,24.23 7.38,25.24 6.23,26.39 1.41,26.39 0.77,25.75 Q1.1
  Bottom 0.127: v13.35,26 13.35,27.02 14.11,27.78 14.11,28.04 13.73,28.42 13.47,28.42 8.65,23.59 v8.65,22.7
PMIC_INT  (via drill 0.3)
  Top 0.127: v26.05,17.5 26.05,18 U$1.P$T2 | v40.02,26 v34.3,26 | v42.43,28.42 43.06,28.42 43.19,28.55 43.83,28.55 IC1.A1
  Bottom 0.127: v26.05,17.5 26.05,20.67 27.57,22.19 31.76,22.19 34.3,24.73 v34.3,26 | v42.43,28.42 v40.02,26
PREVGH  (via drill 0.3)
  Top 0.127: v5.98,25.37 EPD_C9.2 | v5.98,29.81 5.98,31.21 6.87,32.1 6.87,32.23 7.63,32.99 D5.1 | v9.79,13.56 11.31,13.56 J1.21
  Bottom 0.127: v5.98,29.81 5.98,25.62 | 5.98,25.62 v5.98,25.37 | v9.79,13.56 7.63,15.72 7.63,24.99 7,25.62 5.98,25.62
PREVGL  (via drill 0.3)
  Top 0.127: 10.43,26.64 10.43,26.89 v10.81,27.28 | v8.39,28.67 7.63,27.91 D2.2 | v12.08,12.92 11.69,12.54 11.44,12.54 J1.23 | v12.08,24.61 12.08,24.99 10.43,26.64 | 10.43,26.64 EPD_C11.2
  Bottom 0.127: v10.81,27.28 9.79,27.28 v8.39,28.67 | v12.08,24.61 v12.08,12.92
RESET  (via drill 0.3)  (1 unrouted)
  Top 0.127: Q3.2 15.5,28.04 14.62,27.15 14.62,26.64 R1_EP_DR.2 14.49,26.64 15,26.13 v15,24.61 | v13.09,20.92 13.09,21.05 11.69,22.45 11.44,22.45 J1.3 | v33.67,25.88 34.05,25.5 35.19,25.5 36.21,24.48 36.21,19.91 37.98,18.13 38.37,18.13 J2.6 | v16.39,23.72 v22.49,23.72
  Bottom 0.127: v13.09,20.92 13.09,22.7 v15,24.61 15.5,24.61 v16.39,23.72 | v33.67,25.88 31,28.55 28.33,28.55 23.51,23.72 v22.49,23.72
SCL/1.4C
  Top 0.127: IC2.C1 42.3,8.35 41.41,9.24 41.41,10.26 41.16,10.51 40.4,10.51 40.14,10.26 40.14,9.88 U3.7
SCL/2.4C  (via drill 0.3)  (1 unrouted)
  Top 0.127: v43.32,28.04 43.83,28.04 IC1.B1 | v37.09,6.32 37.35,6.32 37.73,5.94 R17.2 | v29.98,12.92 30.36,12.54 30.49,12.54 IC3.12 | v35.95,7.46 37.6,9.11 37.73,9.11 R4.1
  Bottom 0.127: v43.32,28.04 44.33,27.02 44.33,9.88 40.78,6.32 v37.09,6.32 v35.95,7.46 34.17,9.24 34.17,21.18 33.54,21.81 33.28,21.81 32.9,21.43 32.9,18.64 29.98,15.72 v29.98,12.92
SDA/1.4C  (1 unrouted)
SDA/2.4C  (via drill 0.3)
  Top 0.127: v25.16,19.53 25.28,19.53 25.54,19.27 U$1.P$L1 | R2.1 27.57,13.05 27.44,13.18 v26.94,13.18 26.81,13.18 26.43,13.56 26.43,14.32 26.94,14.83 31.38,14.83 32.78,13.43 32.78,11.53 | 32.78,11.53 32.52,11.27 31.63,11.27 31.25,11.65 31.25,11.78 IC3.2 | v43.32,27.28 43.7,27.66 43.83,27.66 IC1.C1 | v38.24,6.95 37.98,6.95 37.73,7.21 R18.2 | 32.78,11.53 33.79,11.53 v34.68,10.64
  Bottom 0.127: v25.16,19.53 25.16,19.15 25.66,18.64 25.66,17.75 25.54,17.62 25.54,16.48 26.94,15.08 v26.94,13.18 | v43.32,27.28 43.32,10.38 41.03,8.1 41.03,6.95 40.65,6.57 38.62,6.57 v38.24,6.95 38.24,7.08 v34.68,10.64
SWDCLK  (via drill 0.3)
  Top 0.127: v34.94,16.73 32.14,16.73 U$1.P$AA24 | v37.86,16.23 38.37,16.73 J2.4
  Bottom 0.127: v34.94,16.73 35.82,15.84 37.48,15.84 v37.86,16.23
SWDIO
  Top 0.127: U$1.P$AC24 32.14,16.23 35.44,16.23 35.82,15.84 37.6,15.84 37.86,15.59 38.37,15.59 J2.2
VBAT/1.2A  (via drill 0.3)
  Top 0.127: v1.41,28.93 0.9,28.93 C27.2 | v16.65,31.85 17.54,31.85 v17.66,31.72 | v27.32,31.72 v26.3,31.72 | v40.52,7.08 40.52,7.84 U3.3 40.52,7.97 40.14,7.97 U3.2
  Bottom 0.127: v1.41,28.93 1.41,29.31 5.09,32.99 15.5,32.99 v16.65,31.85 | v26.3,31.72 v17.66,31.72 | v27.32,31.72 28.46,31.72 33.67,26.51 34.43,26.51 34.81,26.13 34.81,21.31 40.02,16.1 40.02,7.59 v40.52,7.08
VBAT/2.5C  (via drill 0.3)
  Top 0.127: v44.84,27.78 44.33,27.78 IC1.C2 | v42.3,23.97 41.92,23.97 41.79,24.1 C37.2
  Bottom 0.127: v44.84,27.78 44.21,27.78 43.44,28.55 43.19,28.55 42.3,27.66 v42.3,23.97
VBUS/1.5D  (via drill 0.3)
  Top 0.127: D3.5 31.13,32.99 30.49,32.36 30.49,31.72 31,31.21 31,29.69 30.36,29.05 30.11,29.05 C42.2 30.11,28.93 29.35,28.16 v29.35,28.04 | 24.65,29.43 25.28,30.07 27.06,30.07 27.32,29.81 28.84,29.81 C43.1 | 24.65,29.43 24.65,28.29 24.78,28.16 J4.A4_B9 | v20.97,29.94 20.97,29.81 20.2,29.05 20.2,28.16 J4.A9_B4 | 24.65,29.43 v24.14,29.94
  Bottom 0.127: v24.14,29.94 v20.97,29.94 20.97,28.93 20.33,28.29 20.33,20.8 20.71,20.42 20.97,20.42 21.35,20.8 21.35,20.92 28.46,28.04 v29.35,28.04
VBUS/2.6D  (via drill 0.3)
  Top 0.127: v25.79,15.21 26.05,15.46 26.05,15.72 U$1.P$AD2 | v25.79,12.54 26.94,11.4 C21.1 27.06,11.4 27.06,10.89 27.82,10.13 v29.09,10.13 | v41.67,28.93 43.95,28.93 44.21,28.67 44.21,28.55 IC1.A2 | v39.89,27.15 40.14,27.15 41.67,25.62 41.67,25.37 C38.2 | v33.67,10.13 35.57,10.13 37.86,12.42 v41.92,12.42
  Bottom 0.127: v25.79,12.54 v25.79,15.21 | v41.67,28.93 v39.89,27.15 39.51,26.77 39.51,25.88 43.06,22.32 43.06,13.56 v41.92,12.42 | v33.67,10.13 v29.09,10.13
VREG  (via drill 0.3)
  Top 0.127: v44.84,28.42 44.59,28.16 44.33,28.16 IC1.B2 | v45.35,26 44.72,25.37 C39.2
  Bottom 0.127: v44.84,28.42 45.35,27.91 v45.35,26